# Altium PCB Buzzer_v2_PCB.PcbDoc
Units mm, origin at the board's own origin, x right, y up, seen from the top; angles counter-clockwise.
Board outline 22.5 x 38.5 mm, 2 copper layers (Top Layer, Bottom Layer), stack 1.571 mm thick; 9 components, 6 nets, 25 pads, 1 vias.
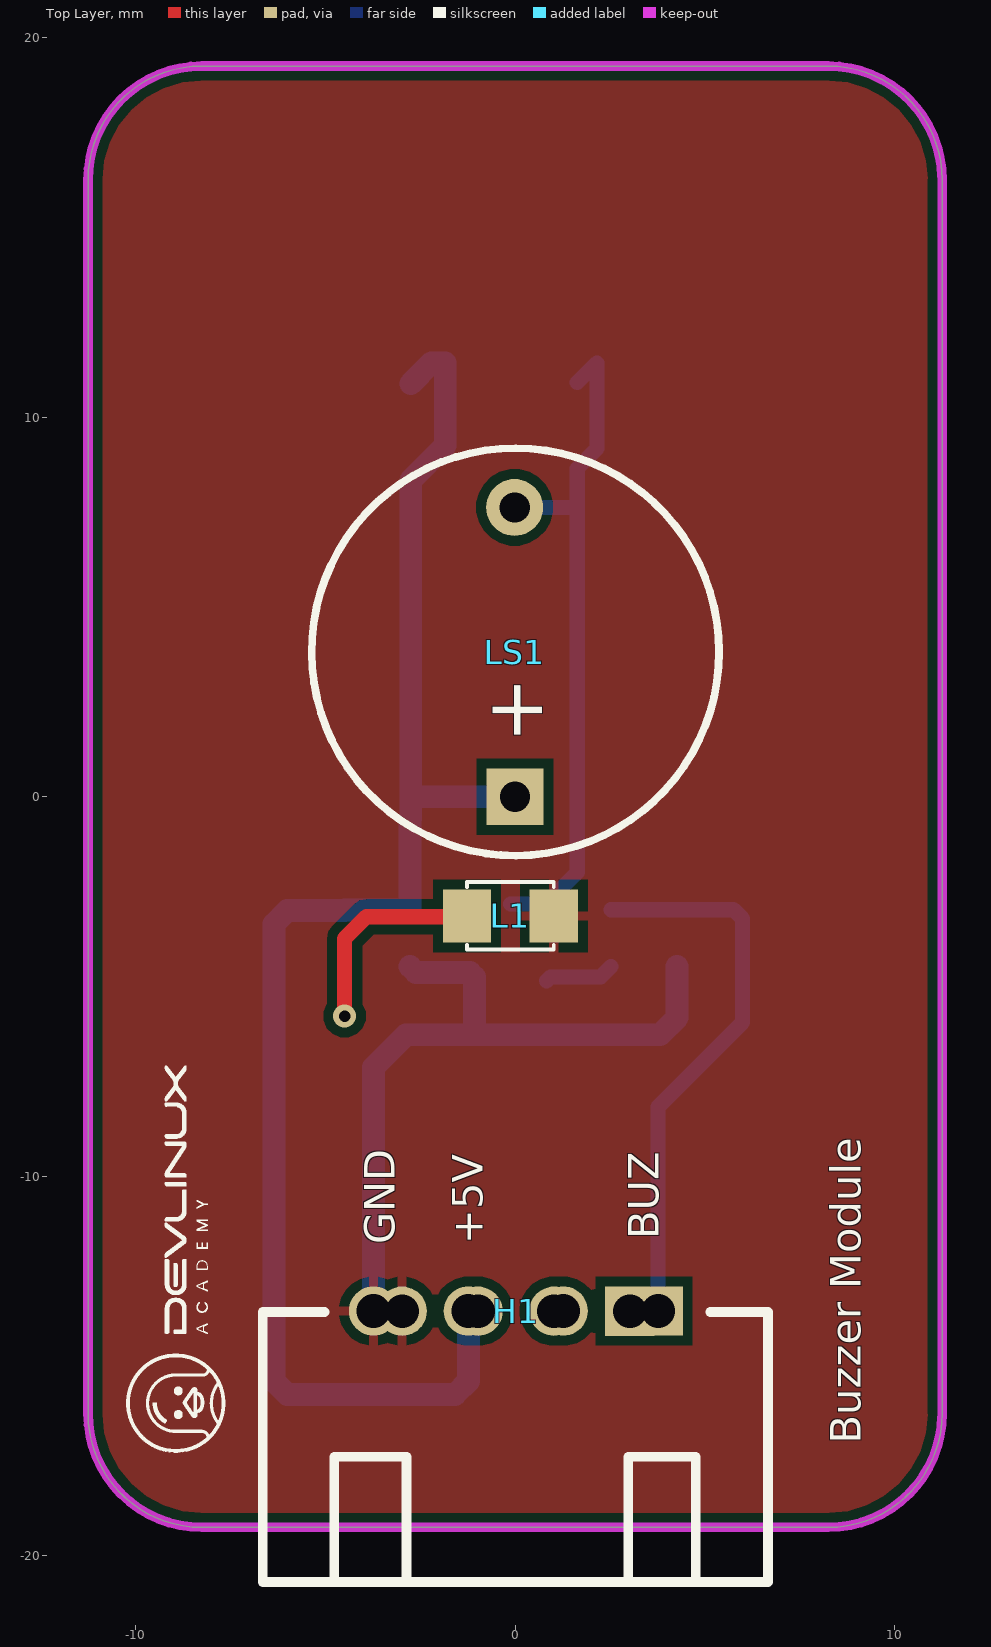
[diagram p0: Top Layer view]
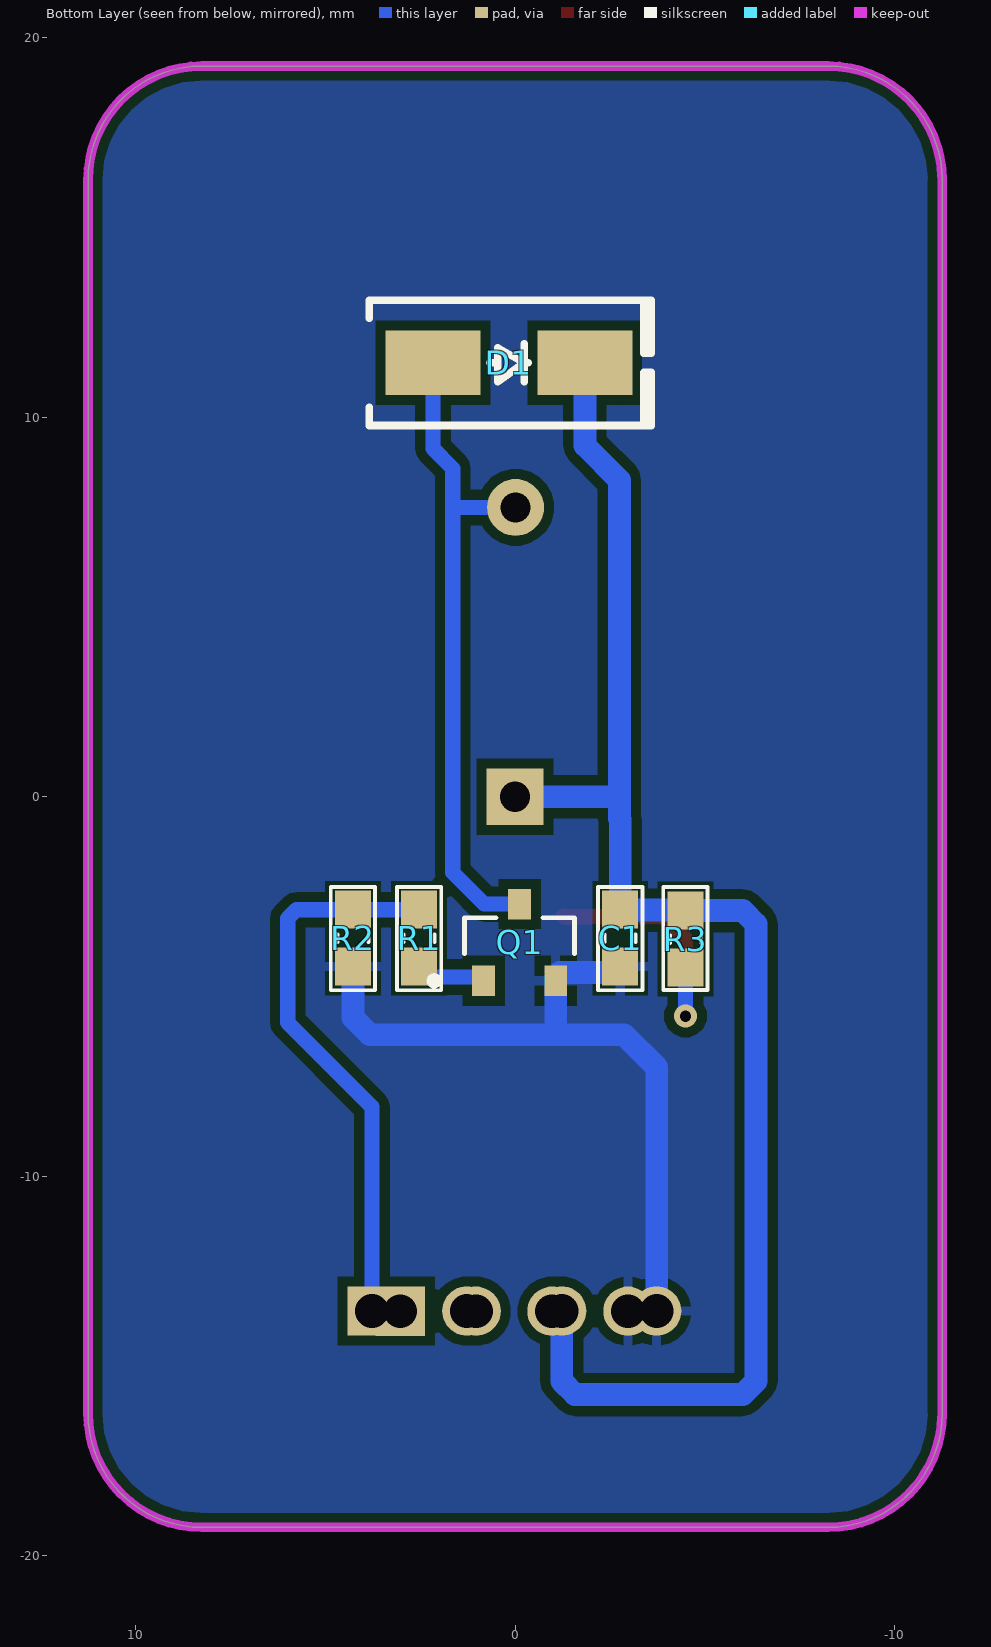
[diagram p1: Bottom Layer view, seen from below]
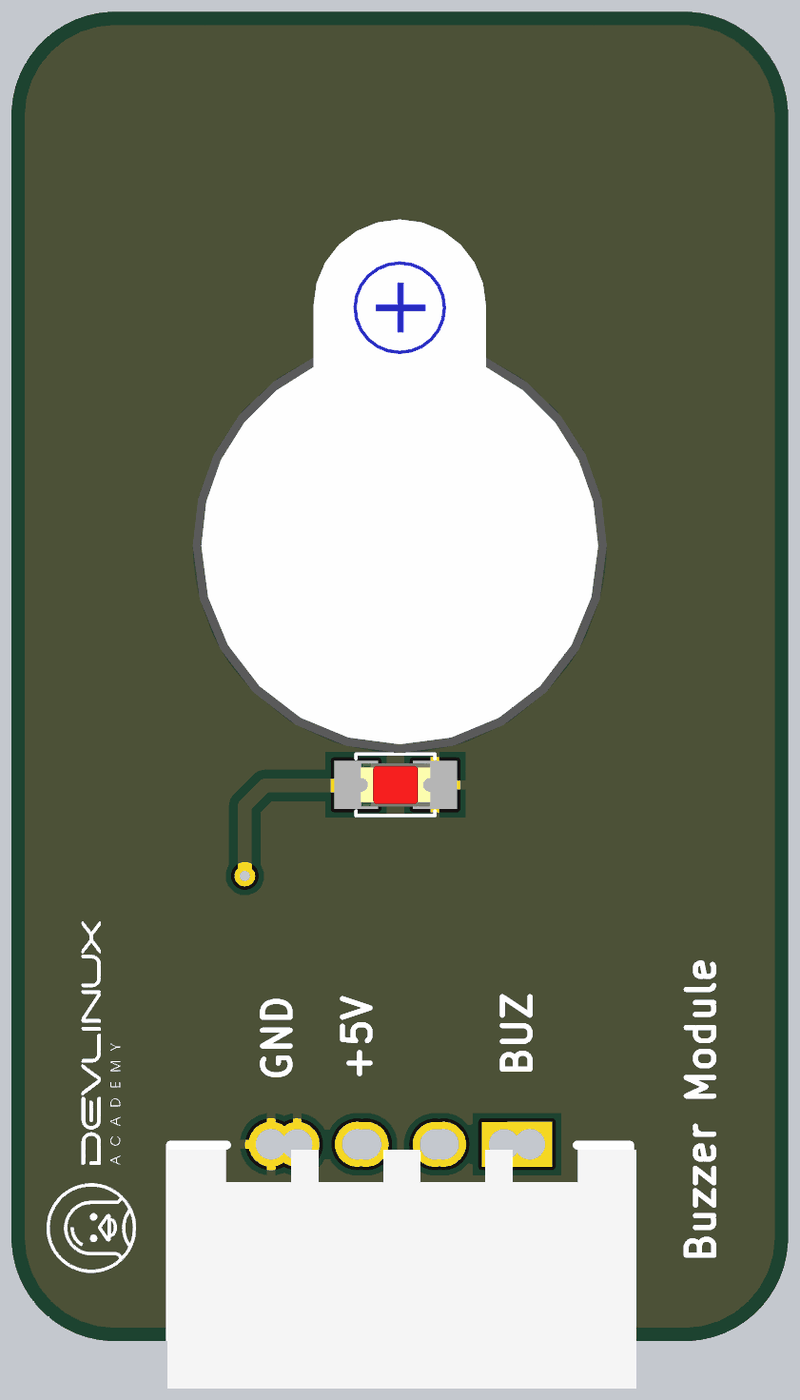
[diagram p2: 3D render of the assembled board from above, using the file's embedded part models]
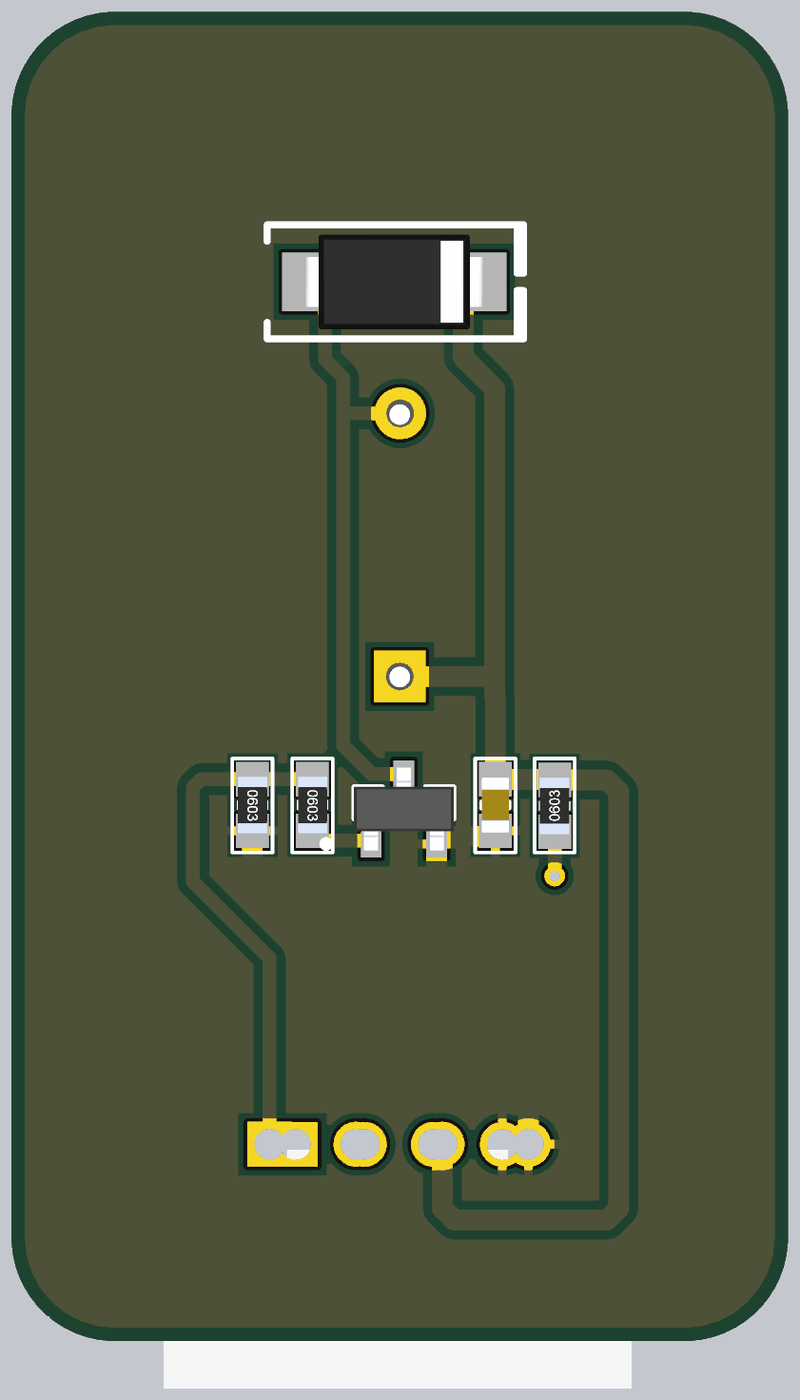
[diagram p3: 3D render of the assembled board from below, using the file's embedded part models]

## Layer stack, top to bottom
Top Solder: solder mask 0.0102, Solder Resist, Dk 3.5
Top Layer: signal copper 0.0356
Dielectric 1: dielectric 1.5, FR-4, Dk 4.8
Bottom Layer: signal copper 0.0356
Bottom Solder: solder mask 0.0102, Solder Resist, Dk 3.5

## Board outline
-11.25,-16.25 -11.25,16.25 cw(c-8.25,16.25) -8.25,19.25 8.25,19.25 cw(c8.25,16.25) 11.25,16.25 11.25,-16.25 cw(c8.25,-16.25) 8.25,-19.25 -8.25,-19.25 cw(c-8.25,-16.25)

## Design rules (kind name [scope] priority, off if disabled: settings)
Clearance [All] p1: gap=0.254 ignorepadtopadclearanceinfootprint=FALSE except(0: Arc-Hole Track-Hole SMDPad-Hole THPad-Hole Via-Hole Fill-Hole Poly-Hole Region-Hole Text-Hole)
PolygonConnect [All] p1: connectstyle=Relief reliefconductorwidth=0.254 reliefentries=4 polygonreliefangle="90 Angle" airgapwidth=0.254
RoomDefinition Buzzer_v2_SCH [InComponentClass('Buzzer_v2_SCH')] p1: confinementstyle=ConfineIn formatcopy=TRUE lockcomponents=FALSE outline -66.523,2.665 -20.168,2.665 -20.168,23.874 -66.523,23.874
RoutingVias [All] p1: holewidth=0.4 width=0.8 viastyle="Through Hole" minholewidth=0.3 minwidth=0.6 maxholewidth=0.5 maxwidth=1
SolderMaskExpansion [All] p1: expansion=0.102 istentingtop=FALSE
Width [All] p1: maxlimit=0.6 minlimit=0.254 preferedwidth=0.4
30 further rules are at their usual default settings.

## Components (designator, comment, footprint, x,y, rotation, side; value= is the part's Value field where it differs from the comment)
C1 "100nF" "tu 0603" -2.77,-3.725 r270 bottom
D1 "SS14" "DIODE SMA" 0.16,11.43 r180 bottom
H1 "Header 4P 2.54 + 2.0 Duc Cong" "Header 4P DC 2.54 + 2.0" 3.745,-13.575 r270 top
L1 "LED RED" LED-0805-Red -1.266,-3.14 r0 top
LS1 "Coi Chip Speaker" "Coi Chip Speacker" 0,0 r90 top
Q1 "SS8050-G" TRANS_SS8050-G -0.12,-3.84 r90 bottom
R1 "470" "tro smd 0603" 2.53,-3.725 r270 bottom
R2 "10k" "tro smd 0603" 4.27,-3.725 r270 bottom
R3 "1k" "tro smd 0603" -4.49,-3.75 r90 bottom

## Footprints (in the part's own frame and the unit in brackets; to place one, negate y for a bottom-side part, rotate by r counter-clockwise, add the part's x,y. Pads: shape width x height; smd on the part's side, far side on the other; paste and mask are expansions set on the pad)
"Coi Chip Speacker" [mm]
  rect 1.5x1.5 hole 0.8: 1(0,0)
  round 1.5 hole 0.8: 2(7.62,0.013)
  silkscreen extent -1.55,-5.38 9.18,5.36, body extent -2.22,-6 13.24,6, height 4.5
"DIODE SMA" [mm] "SMA"
  rect 2.5x1.7 smd: 1(-2,0) 2(2,0)
  silkscreen extent -3.68,-1.65 3.75,1.65, body extent -2.6,-1.37 2.6,1.37, height 2.4
"Header 4P DC 2.54 + 2.0" [mm]
  rect 1.3x1.3 hole 0.889: 1(-0.025,0.025) 1(-0.022,-0.719)
  round 1.3 hole 0.889: 2(-0.025,-2.475) 2(-0.022,-2.719) 3(-0.025,-4.975) 3(-0.022,-4.719) 4(-0.025,-7.475) 4(-0.022,-6.718)
  silkscreen extent 0,-10.39 7.11,2.92, body extent 0.13,-10.48 7.06,3.11, height 7.38
LED-0805-Red [mil]
  rect 50x55 smd: 1(0,0) 2(90,0)
  silkscreen extent 0,-35 90,35, body extent 5,-25 85,25, height 43
TRANS_SS8050-G [mm]
  rect 0.8x0.6 smd: 1(-1.01,0.95) 2(-1.01,-0.95) 3(1.01,0)
  silkscreen extent -1.11,-1.45 0.65,2.35, body extent -1.2,-1.45 1.2,1.45, height 1.14
"tro smd 0603" [mm] "Chip Capacitor, 2-Leads, Body 1,60x0,80mm, IPC Medium Density"
  rect 1x0.95 smd mask+0.076: 1(-0.75,0) 2(0.75,0)
  silkscreen extent -1.35,-0.58 1.37,0.58, body extent -0.82,-0.42 0.82,0.43, height 0.44
"tu 0603" [mm] "Chip Capacitor, 2-Leads, Body 1,60x0,80mm, IPC Medium Density"
  rect 1x0.95 smd mask+0.076: 1(-0.75,0) 2(0.75,0)
  silkscreen extent -1.35,-0.58 1.37,0.58, body extent -0.8,-0.4 0.8,0.4, height 0.9

## Part data
C1: library part "Tu 0603 104 50V 10%", "Dán", Chung_Loai=Dán, Don_Vi=Con, Ma_Hang=MH004568, So_Chan=2, Ten_Linh_Kien="Tụ 0603 104-100nF 10% 50V"
D1: library part "Diode SS14 ( 1N5819)", "Dán", Chung_Loai=Dán, Don_Vi=Con, Ma_Hang=MH002211, Ten_Linh_Kien="Diode SS14 DO214 Schottky 1A 40V ( 1N5819 DO214)"
H1: "Cắm", Chung_Loai=Cắm, Don_Vi=Con, Ma_Hang=MH001310, Ten_Linh_Kien="Header 4P XH2.54-4P Đực Cong"
L1: library part "LED 0805 Do", "Dán", Chung_Loai=Dán, Don_Vi=Con, Ma_Hang=MH000897, Ten_Linh_Kien="LED 0805 Màu Đỏ (Red)"
LS1: "Còi chip"
Q1: "Bipolar (BJT) Transistor NPN 25 V 1.5 A 100MHz 300 mW Surface Mount SOT-23-3", Package=None, Check_prices=https://www.snapeda.com/parts/SS8050G/Comchip/view-part/?ref=eda, Digi-Key_Part_Number=641-1790-2-ND, MF=Comchip, MP=SS8050G, SnapEDA_Link=https://www.snapeda.com/parts/SS8050G/Comchip/view-part/?ref=snap
R1 R2: library part "Tro 0603 5% 100R", "Dán", Chung_Loai=Dán, Don_Vi=Con, Ma_Hang=MH006315, So_Chan=2, Ten_Linh_Kien="Trở 0603 5% 100R"
R3: library part "Tro 0603 1% 1k", "Dán", Chung_Loai=Dán, Don_Vi=Con, Ma_Hang=MH006334, So_Chan=2, Ten_Linh_Kien="Trở 0603 1% 1k"

## Via types
v1: diameter 0.6, hole 0.3, Top Layer to Bottom Layer, 1 vias

## Nets (pads, with @x,y where several pads share a name; then routed paths per layer and width w, separated by ;. In a path a pad name is that pad's centre, name@x,y a point inside that pad or via, vN(x,y) a via of type N, cw(c..) or ccw(c..) an arc to the next point about the centre after c; other vN are vias at no path point)
+5: C1.1 D1.2 H1.3 LS1.1 R3.2 | length 41.7
  Bottom Layer w0.6: D1.2@-2.75,10.88 -2.2,11.43 D1.2 -1.84,9.25 -2.75,8.34 -2.75,0 ; H1.3@-1.23,-13.55 -1.23,-15.399 -1.581,-15.75 -5.999,-15.75 -6.35,-15.399 -6.35,-8.45 -6.35,-3.351 -5.999,-3 R3.2 -4.478,-2.988 -2.782,-2.988 C1.1 -2.77,-0.6 -2.75,-0.58 -2.75,0 ; LS1.1 -2.75,0
BUZZER: H1.1 R1.1 R2.1 | length 14.8
  Bottom Layer w0.4: R1.1 R2.1 5.756,-2.975 5.99,-3.21 5.99,-5.95 3.77,-8.17 H1.1@3.77,-13.55
GND: C1.2 H1.4 L1.2 Q1.2 R2.2 | length 19.7
  Bottom Layer w0.6: H1.4@-3.73,-13.55 -3.73,-7.13 -2.87,-6.27 -1.07,-6.27 3.82,-6.27 4.27,-5.82 R2.2 ; C1.2 -2.611,-4.634 -1.186,-4.634 -1.07,-4.75 -1.07,-6.13 -0.93,-6.27
NetD1_1: D1.1 LS1.2 Q1.3 | length 18.2
  Bottom Layer w0.4: Q1.3 0.81,-2.83 1.64,-2 1.64,7.68 ; LS1.2 1.58,7.62 1.64,7.68 ; D1.1@1.64,10.91 D1.1 2.16,9.17 1.64,8.65 1.64,7.68
NetL1_1: L1.1 R3.1 | length 6.8
  Top Layer w0.4: v1(-4.49,-5.78) -4.49,-3.74 -3.91,-3.16 -1.286,-3.16 L1.1
  Bottom Layer w0.4: v1(-4.49,-5.78) R3.1
NetQ1_1: Q1.1 R1.2 | length 1.9
  Bottom Layer w0.4: Q1.1 0.93,-4.75 2.255,-4.75 R1.2
pads on no net: H1.2

## Polygon pours and split planes (outlines as drawn)
GND on Top Layer "NONET_L-01_P-001" (solid, remove dead copper, pour order 0): -12.26,20.43 -11.28,19.45 14.19,19.45 14.19,-21.15 12.74,-22.6 11.61,-21.47 -13.24,-21.47
GND on Bottom Layer "NONET_L-01_P-001" (solid, remove dead copper, pour order 1): -12.32,20.01 13.45,20.01 14.56,18.9 14.56,-22.77 -13.03,-22.77 -13.33,-22.47

## Keep-outs
Keep-Out Layer:
  the board outline again, w0.254

## Silkscreen, mask and mechanical layers (free items; w line width, h text height)
Top Overlay:
  drawing of 21 lines, arcs and shapes, not listed
  text "BUZ" at 3.78,-11.66 h0.8 r90
  text "GND" at -3.17,-11.793 h0.8 r90
  text "+5V" at -0.853,-11.793 h0.8 r90
  text "Buzzer Module" at 9.11,-17.05 h0.8 r90

## Text inside footprints (layer, text, board x,y; h text height)
LS1: Top Overlay "+" at 0.711,1.41 h1.52 r90